# Altium PCB 电机控制.PcbDoc (part 2 of 4)
Units mil, origin at the board's own origin, x right, y up, seen from the top; angles counter-clockwise.
Board outline 4818.9 x 3440.94 mil, 2 copper layers (Top Layer, Bottom Layer); 168 components, 177 nets, 592 pads, 87 vias.
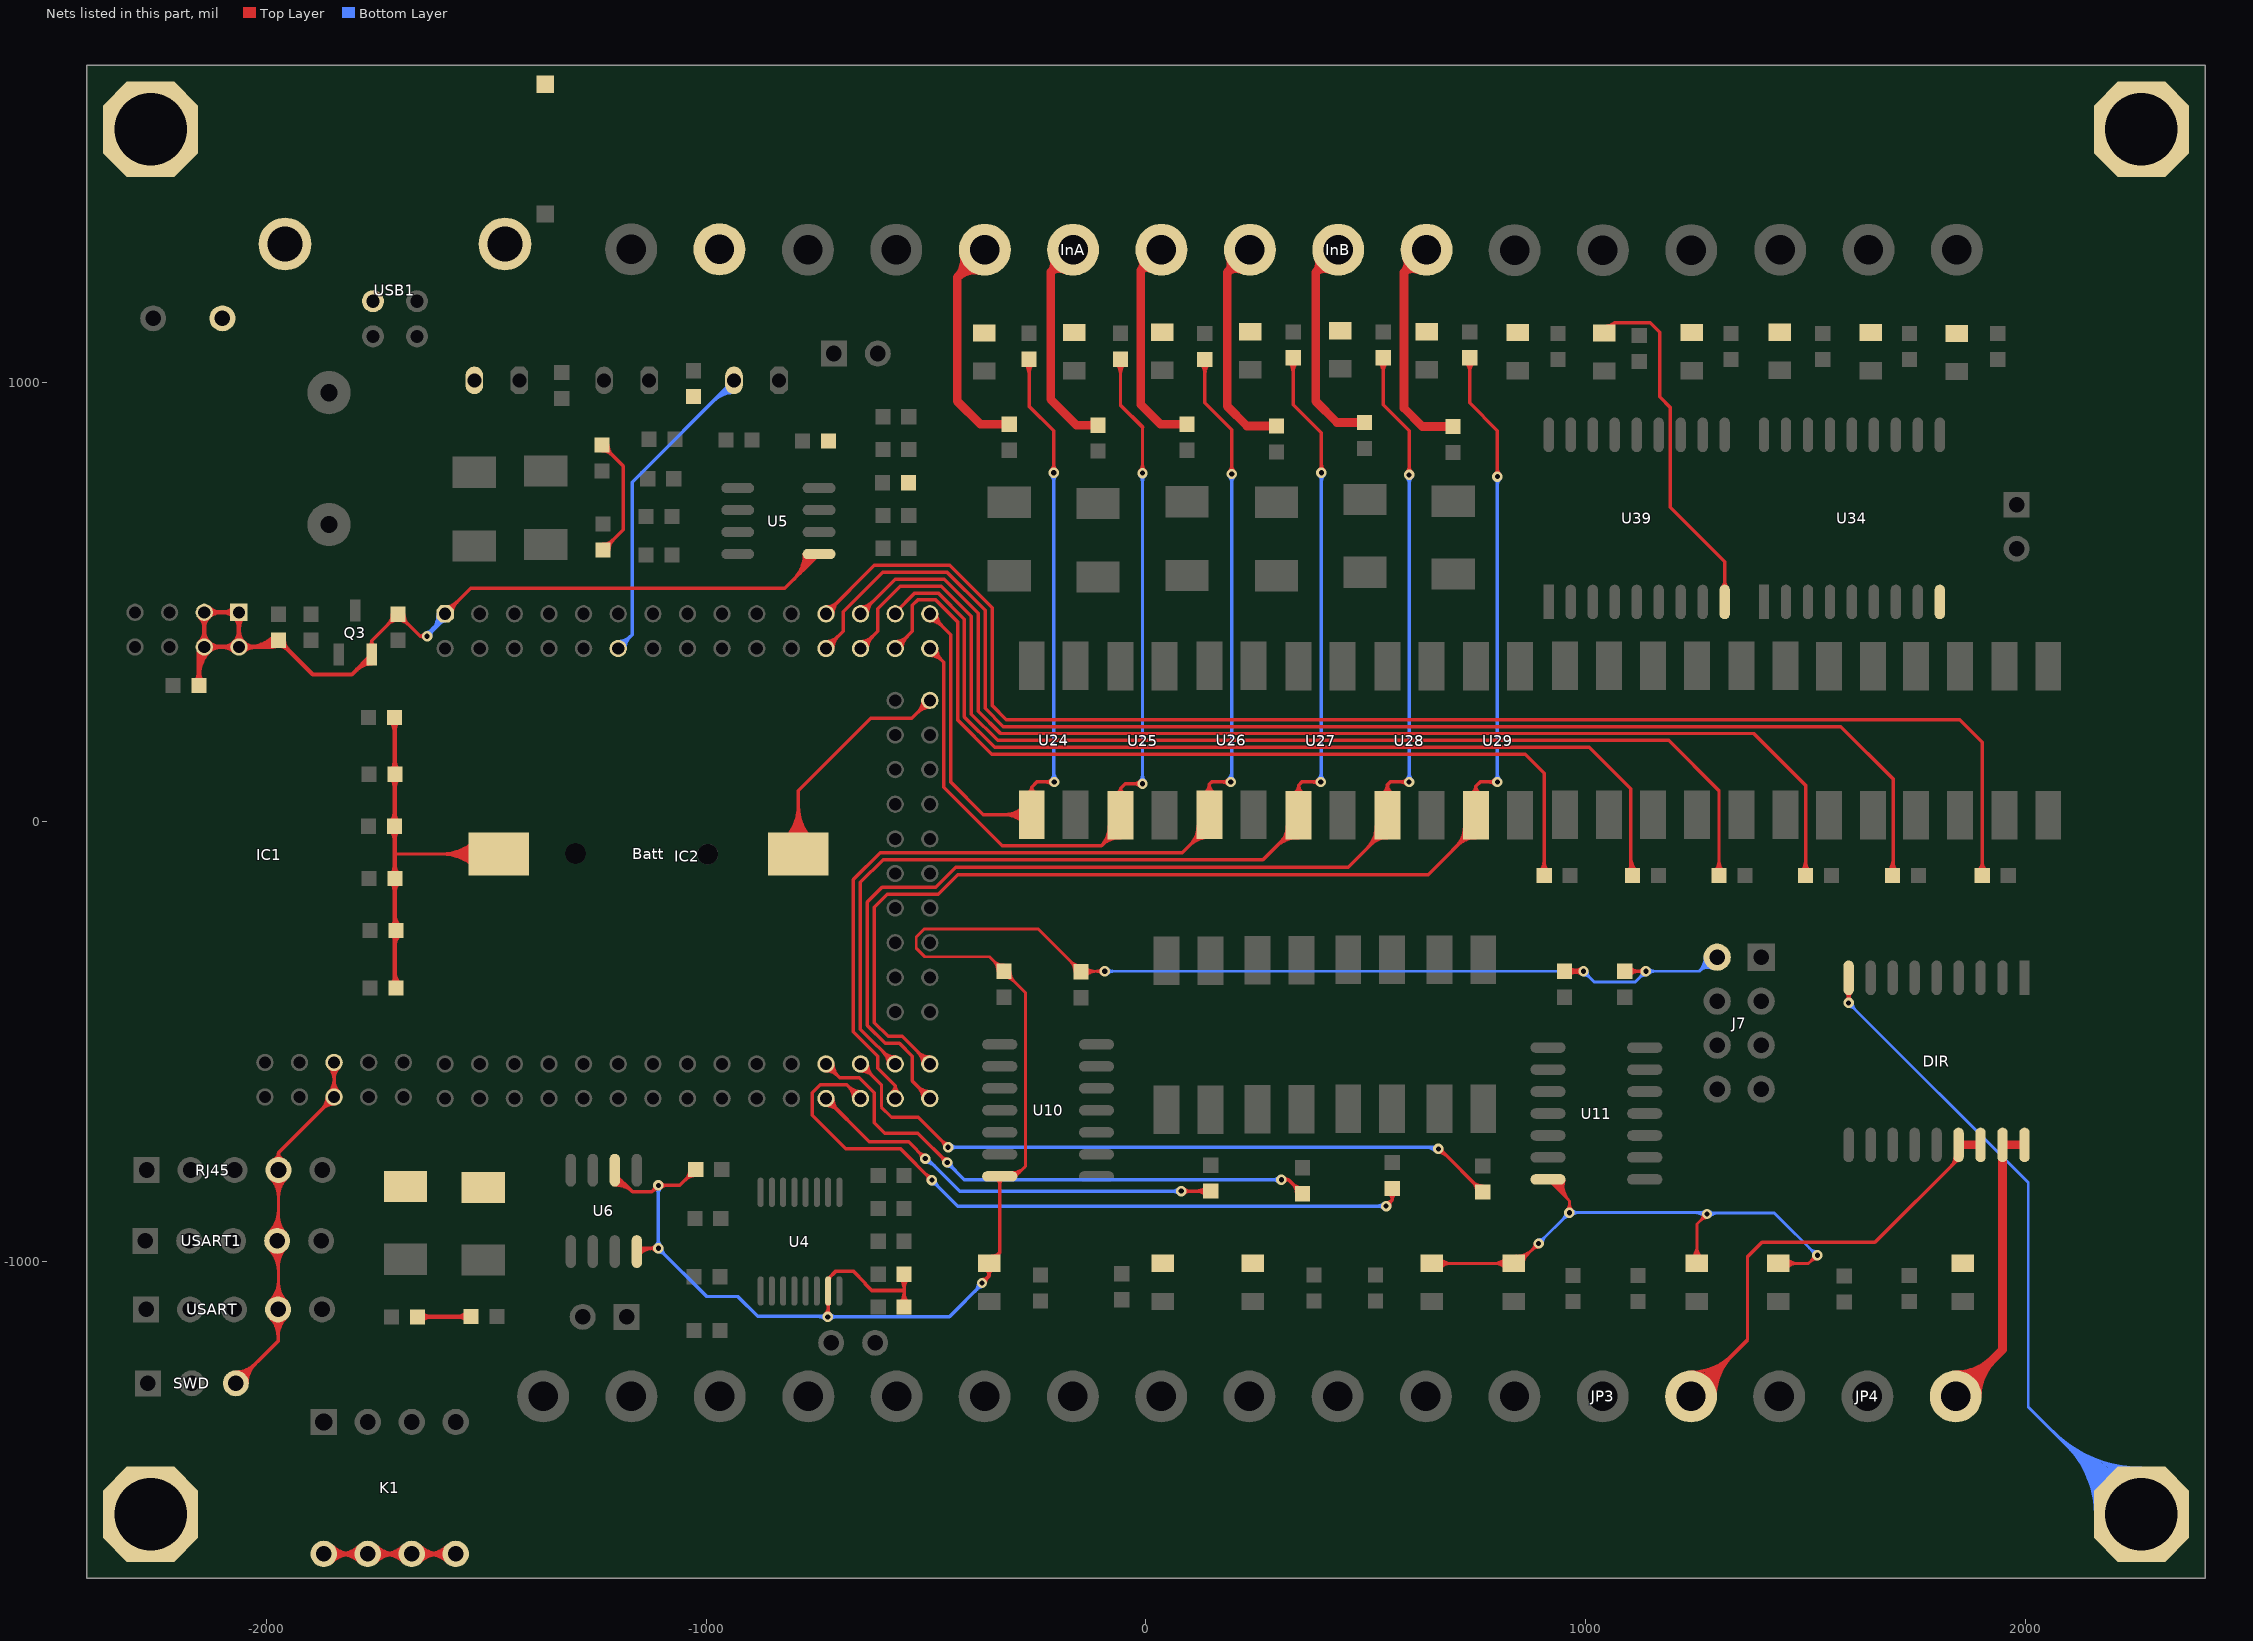
[diagram p2: the nets of this part, all layers, seen from the top]

## Via types
v1: diameter 23.62, hole 11.81, Top Layer to Bottom Layer, 87 vias

## Nets (pads, with @x,y where several pads share a name; then routed paths per layer and width w, separated by ;. In a path a pad name is that pad's centre, name@x,y a point inside that pad or via, vN(x,y) a via of type N, cw(c..) or ccw(c..) an arc to the next point about the centre after c; other vN are vias at no path point) (continued)
DIR3: DIR.15 DIR.16 JP3.3 | length 1711.4
  Top Layer w7.87: JP3.3@1239.57,-1307 1368,-1178.57 1368,-989 1401,-956 1658,-956 1848,-766 DIR.15@1848,-734.92 ; JP3.3@1239.57,-1275.5 ccw(c1239.57,-1199.46) 1293.34,-1253.23 ccw(c1347.11,-1307) JP3.3@1271.07,-1307 ; JP3.3@1239.57,-1267.63 ccw(c1239.57,-1172.58) 1306.78,-1239.79 ccw(c1373.99,-1307) JP3.3@1278.95,-1307 ; JP3.3@1239.57,-1259.75 ccw(c1239.57,-1145.7) 1320.23,-1226.35 ccw(c1400.88,-1307) JP3.3@1286.82,-1307 ; JP3.3@1239.57,-1251.88 ccw(c1239.57,-1118.81) 1333.67,-1212.91 ccw(c1427.76,-1307) JP3.3@1294.69,-1307 ; 1832.07,-781.93 ccw(c1812.62,-762.48) DIR.15@1840.13,-762.48 ; 1840.57,-773.43 cw(c1848,-780.87) DIR.15@1848,-770.35
  Top Layer w19.68: DIR.15@1848,-734.92 DIR.16@1898,-734.92
DIR4: DIR.17 DIR.18 JP4.3 | length 964.8
  Top Layer w19.68: JP4.3@1841.57,-1307 1948,-1200.57 DIR.17@1948,-734.92 DIR.18@1998,-734.92 ; JP4.3@1841.57,-1277.47 ccw(c1841.57,-1206.19) 1891.98,-1256.59 ccw(c1942.39,-1307) JP4.3@1871.1,-1307 ; JP4.3@1841.57,-1257.79 ccw(c1841.57,-1138.98) 1925.59,-1222.99 ccw(c2009.6,-1307) JP4.3@1890.79,-1307
ERR_LED: IC2.12 LED3.K | length 899.1
  Bottom Layer w7.87: IC2.12@-1200.3,394.26 -1168.8,425.76 -1168.8,772.14 LED3.K@-937.01,1003.94 ; IC2.12@-1200.3,410.01 ccw(c-1200.3,448.03) -1173.42,421.14 ccw(c-1146.53,394.26) IC2.12@-1184.55,394.26 ; -984.06,956.88 cw(c-937.01,909.83) LED3.K@-937.01,976.37 ; -970.62,970.33 cw(c-937.01,936.71) LED3.K@-937.01,984.25 ; -957.18,983.77 cw(c-937.01,963.6) LED3.K@-937.01,992.12 ; -956.3,984.65 ccw(c-964.09,992.44) LED3.K@-953.07,992.44
GND: Batt.2 C1.2 C2.2 C3.2 C4.2 C5.2 C6.2 C7.2 C8.2 C9.2 C18.2 C19.2 C20.2 C24.2 C25.1 C26.1 C27.2 C28.1 C29.1 D1.A D2.A Ddir1.K Ddir2.K Ddir3.K Ddir4.K DIR.9 IC1.2 IC1.4 IC1.5 IC2.1 J1.1 J7.1 K1.5 K1.6 K1.7 K1.8 LED1.K LED10.K LED12.K LED14.K LED16.K LED27.K LED28.K LED29.K LED30.K LED31.K LED32.K LED33.K LED34.K LED35.K LED36.K LED37.K LED260.K PAD1.1 PAD2.1 PAD3.1 PAD4.1 Q3.2 R11.2 R14.1 R37.2 R38.2 R39.2 R40.2 RJ45.4 S2.2 SWD.3 U4.15 U5.5 U6.2 U6.8 U10.7 U11.7 U34.9 U39.9 USART1.4 USART.4 USB1.4 USB1.5 USB1.6 | length 23189.6
  Top Layer w6.5: R37.2@-337.07,-339.95 ccw(c-371.05,-339.95) -347.02,-315.92 ccw(c-323,-291.9) R37.2@-323,-325.87 ; U10.7@-332.65,-806.47 -296.46,-806.47 -274,-784 -274,-388.94 R37.2@-323,-339.95 -356,-306.94 -503.3,-306.94 -522.45,-287.79 -522.45,-262.27 -504.18,-244 -244.94,-244 R38.2@-148,-340.95 -147.05,-340 v1(-94,-340) ; R37.2@-330.57,-339.95 ccw(c-348.85,-339.95) -335.93,-327.02 ccw(c-323,-314.09) R37.2@-323,-332.37 ; R37.2@-323,-354.02 cw(c-323,-387.99) -298.98,-363.97 cw(c-274.95,-339.95) R37.2@-308.93,-339.95 ; R37.2@-323,-347.52 cw(c-323,-365.8) -310.07,-352.87 cw(c-297.14,-339.95) R37.2@-315.43,-339.95 ; U10.7@-304.65,-804.22 ccw(c-304.65,-779.03) -286.84,-796.84 ; U10.7@-304.65,-797.72 ccw(c-304.65,-756.84) -275.74,-785.74 ; R38.2@-162.07,-340.95 ccw(c-196.05,-340.95) -172.02,-316.92 ccw(c-148,-292.9) R38.2@-148,-326.87 ; R38.2@-155.57,-340.95 ccw(c-173.85,-340.95) -160.93,-328.02 ccw(c-148,-315.09) R38.2@-148,-333.37 ; R38.2@-142.64,-346.3 cw(c-127.44,-361.51) -127.44,-340 ; R38.2@-138.05,-350.9 cw(c-111.74,-377.2) -111.74,-340 ; R38.2@-138.05,-330.99 ccw(c-116.31,-309.25) -116.31,-340 ; v1@-100.05,-346.05 ccw(c-114.67,-360.67) -114.67,-340 ccw(c-114.67,-319.33) v1@-100.05,-333.95 ; Ddir2.K@650,-1004.39 LED14.K@836,-1004.39 847.61,-1004.39 v1(893,-959) ; Ddir2.K@662.93,-1011.41 cw(c679.89,-1028.37) 679.89,-1004.39 cw(c679.89,-980.4) Ddir2.K@662.93,-997.36 ; Ddir2.K@667.53,-1016.01 cw(c695.58,-1044.07) 695.58,-1004.39 cw(c695.58,-964.71) Ddir2.K@667.53,-992.77 ; LED14.K@818.47,-1016.01 ccw(c790.42,-1044.07) 790.42,-1004.39 ccw(c790.42,-964.71) LED14.K@818.47,-992.77 ; LED14.K@823.07,-1011.41 ccw(c806.11,-1028.37) 806.11,-1004.39 ccw(c806.11,-980.4) LED14.K@823.07,-997.36 ; LED14.K@841.91,-994.45 ccw(c841.91,-956.7) 868.6,-983.4 ; LED14.K@841.91,-987.95 ccw(c841.91,-934.5) 879.7,-972.3 ; LED14.K@858.34,-1004.39 cw(c884.25,-1004.39) 865.93,-986.07 ; v1@884.44,-959 cw(c863.77,-959) 878.39,-973.61 cw(c893,-988.23) v1@893,-967.56 ; U11.7@913.2,-805.4 ccw(c922.49,-807.97) U11.7@915.67,-814.78 ; U11.7@914.36,-813.47 963,-862.11 ; U11.7@919.46,-807.13 ccw(c934.84,-811.39) U11.7@923.56,-822.67 ; U11.7@925.73,-808.87 ccw(c947.2,-814.81) 931.45,-830.56 ; U11.7@931.99,-810.6 ccw(c959.56,-818.22) 939.34,-838.45 ; U11.7@938.26,-812.33 ccw(c971.92,-821.64) 947.22,-846.33 ; U11.7@944.52,-814.06 ccw(c984.27,-825.06) 955.11,-854.22 ; U11.7@950.79,-815.8 ccw(c996.63,-828.48) 963,-862.11 ; R39.2@952,-339.95 952.06,-340 v1(995,-340) ; v1@956.95,-882.95 ccw(c942.33,-868.33) 963,-868.33 ccw(c983.67,-868.33) v1@969.05,-882.95 ; R39.2@957.36,-345.3 cw(c970.15,-358.09) 970.15,-340 ; R39.2@957.36,-334.59 ccw(c970.42,-321.53) 970.42,-340 ; R39.2@961.95,-349.9 cw(c985.84,-373.79) v1@985.84,-340 ; R39.2@961.95,-329.99 ccw(c986.11,-305.84) v1@986.11,-340 ; v1(963,-889) 963,-862.11 ; 972.88,-336.45 ccw(c977.99,-317.4) v1@989.85,-333.16 ; 972.92,-343.46 cw(c977.96,-362.3) v1@989.8,-346.8 ; 979.81,-338.31 cw(c976.49,-350.69) v1@987.59,-344.28 ; 979.95,-341.58 ccw(c976.69,-329.43) v1@987.59,-335.72 ; v1@988.95,-346.05 ccw(c974.33,-360.67) 974.33,-340 ccw(c974.33,-319.33) v1@988.95,-333.95 ; R40.2@1089,-339.95 1089.06,-340 v1(1137,-340) ; R40.2@1094.36,-345.3 cw(c1107.15,-358.09) 1107.15,-340 ; R40.2@1094.36,-334.59 ccw(c1107.42,-321.53) 1107.42,-340 ; R40.2@1098.95,-349.9 cw(c1122.84,-373.79) 1122.84,-340 ; R40.2@1098.95,-329.99 ccw(c1123.11,-305.84) 1123.11,-340 ; v1@1130.95,-346.05 ccw(c1116.33,-360.67) 1116.33,-340 ccw(c1116.33,-319.33) v1@1130.95,-333.95 ; Ddir3.K@1241.38,-992.77 ccw(c1213.32,-964.71) 1253,-964.71 ccw(c1292.68,-964.71) Ddir3.K@1264.62,-992.77 ; Ddir3.K@1245.98,-997.36 ccw(c1229.02,-980.4) 1253,-980.4 ccw(c1276.99,-980.4) Ddir3.K@1260.03,-997.36 ; Ddir3.K@1253,-1004.39 1253,-915 v1(1276,-892) ; v1@1267.44,-892 cw(c1246.77,-892) 1261.39,-906.61 cw(c1276,-921.23) v1@1276,-900.56 ; LED16.K@1438,-1004.39 1506.61,-1004.39 1525,-986 v1(1527,-986) ; LED16.K@1450.93,-1011.41 cw(c1467.89,-1028.37) 1467.89,-1004.39 cw(c1467.89,-980.4) LED16.K@1450.93,-997.36 ; LED16.K@1455.53,-1016.01 cw(c1483.58,-1044.07) 1483.58,-1004.39 cw(c1483.58,-964.71) LED16.K@1455.53,-992.77 ; 1508.97,-1002.03 cw(c1527,-1020.06) v1@1527,-994.56 ; 1513.8,-997.2 ccw(c1502.6,-986) v1@1518.44,-986 ; v1@1591.95,-405.95 ccw(c1577.33,-391.33) 1598,-391.33 ccw(c1618.67,-391.33) v1@1604.05,-405.95 ; DIR.9@1591.95,-388.61 cw(c1577.33,-403.23) 1598,-403.23 cw(c1618.67,-403.23) DIR.9@1604.05,-388.61 ; v1@1593.19,-404.92 ccw(c1588.94,-398.65) 1596.25,-396.69 ; v1@1593.72,-404.59 ccw(c1587.26,-393.4) 1599.74,-396.74 ; 1596.26,-396.75 ccw(c1608.74,-393.4) v1@1602.28,-404.59 ; v1(1598,-412) DIR.9@1598,-355 ; 1599.75,-396.69 ccw(c1607.07,-398.65) v1@1602.81,-404.92
  Top Layer w7.87: SWD.3@-2070,-1277 -1974,-1181 USART.4@-1974,-1109 -1973,-1108 RJ45.4@-1973,-792 -1973,-752.52 ; SWD.3@-2070,-1259.28 ccw(c-2070,-1216.51) -2039.76,-1246.76 ccw(c-2009.51,-1277) SWD.3@-2052.28,-1277 ; SWD.3@-2070,-1251.41 ccw(c-2070,-1189.63) -2026.31,-1233.31 ccw(c-1982.63,-1277) SWD.3@-2044.41,-1277 ; USART1.4@-1994.1,-971.1 cw(c-2045.02,-1022.02) -1973,-1022.02 ; USART1.4@-1994.1,-934.9 ccw(c-2045.02,-883.98) -1973,-883.98 ; USART.4@-1992.1,-1127.1 cw(c-2035.78,-1170.78) -1974,-1170.78 cw(c-1912.22,-1170.78) USART.4@-1955.9,-1127.1 ; USART.4@-1992.1,-1090.9 ccw(c-2038.2,-1044.8) -1973,-1044.8 ; RJ45.4@-1991.1,-810.1 cw(c-2034.78,-853.78) -1973,-853.78 cw(c-1911.22,-853.78) RJ45.4@-1954.9,-810.1 ; USART1.4@-1988.53,-965.53 cw(c-2026.01,-1003.01) -1973,-1003.01 ; USART1.4@-1988.53,-940.47 ccw(c-2026.01,-902.99) -1973,-902.99 ; USART.4@-1986.53,-1121.53 cw(c-2016.77,-1151.77) -1974,-1151.77 cw(c-1931.23,-1151.77) USART.4@-1961.47,-1121.53 ; USART.4@-1986.53,-1096.47 ccw(c-2019.19,-1063.81) -1973,-1063.81 ; RJ45.4@-1985.53,-804.53 cw(c-2015.77,-834.77) -1973,-834.77 cw(c-1930.23,-834.77) RJ45.4@-1960.47,-804.53 ; RJ45.4@-1983.45,-768.64 ccw(c-1990.66,-752.52) -1973,-752.52 ; USART1.4@-1982.96,-959.96 cw(c-2007,-984) -1973,-984 ; USART1.4@-1982.96,-946.04 ccw(c-2007,-922) -1973,-922 ; -1973,-1068.64 ccw(c-1933.64,-1068.64) USART.4@-1961.47,-1096.47 ; -1973,-1049.63 ccw(c-1914.63,-1049.63) USART.4@-1955.9,-1090.9 ; -1973,-1007.54 cw(c-1921.46,-1007.54) USART1.4@-1957.9,-971.1 ; -1973,-988.53 cw(c-1940.47,-988.53) USART1.4@-1963.47,-965.53 ; -1973,-917.47 ccw(c-1940.47,-917.47) USART1.4@-1963.47,-940.47 ; -1973,-898.46 ccw(c-1921.46,-898.46) USART1.4@-1957.9,-934.9 ; RJ45.4@-1962.55,-768.64 cw(c-1955.34,-752.52) -1973,-752.52 ; IC1.2@-1862.23,-626 cw(c-1900.25,-626) -1873.37,-652.88 cw(c-1846.48,-679.77) IC1.2@-1846.48,-641.75 ; IC1.2@-1857.62,-614.86 ccw(c-1884.5,-587.98) -1846.48,-587.98 ccw(c-1808.46,-587.98) IC1.2@-1835.35,-614.86 ; IC1.2@-1857.62,-558.39 cw(c-1884.5,-585.28) -1846.48,-585.28 cw(c-1808.46,-585.28) IC1.2@-1835.35,-558.39 ; IC1.2@-1846.48,-547.26 IC1.2@-1846.48,-626 -1973,-752.52 ; Q3.2@-1766.54,398.79 ccw(c-1779.66,412.06) -1761,412.06 ; Q3.2@-1761,380 -1761,412.06 ; Q3.2@-1755.46,398.79 cw(c-1742.33,412.06) -1761,412.06 ; C6.2@-1714.39,472.05 cw(c-1746.7,472.05) -1723.85,449.2 cw(c-1701,426.35) -1701,458.67 cw(c-1701,426.35) -1678.15,449.2 cw(c-1655.3,472.05) C6.2@-1687.62,472.05 ; -1708.94,-75 -1707.23,-73.28 Batt.2@-1471.72,-73.28 ; v1@-1641.25,417.21 ccw(c-1650.95,409.79) -1650.95,422 ; v1@-1641.25,426.79 cw(c-1650.95,434.21) -1650.95,422 ; v1(-1635,422) -1650.95,422 ; Batt.2@-1523.42,-105.3 ccw(c-1600.71,-182.59) -1600.71,-73.28 ccw(c-1600.71,36.02) Batt.2@-1523.42,-41.27 ; Batt.2@-1517.86,-99.73 ccw(c-1581.7,-163.58) -1581.7,-73.28 ccw(c-1581.7,17.01) Batt.2@-1517.86,-46.84 ; Batt.2@-1512.29,-94.16 ccw(c-1562.7,-144.57) -1562.7,-73.28 ccw(c-1562.7,-2) Batt.2@-1512.29,-52.4 ; Batt.2@-1506.72,-88.59 ccw(c-1543.69,-125.56) -1543.69,-73.28 ccw(c-1543.69,-21.01) Batt.2@-1506.72,-57.97 ; U6.2@-1208.54,-802.33 cw(c-1208.43,-805.43) U6.2@-1206.24,-803.24 ; U6.2@-1208.27,-810.2 cw(c-1207.58,-830.22) -1193.42,-816.05 ; U6.2@-1208,-818.07 cw(c-1206.74,-855.01) -1180.6,-828.87 ; U6.2@-1208,-792.48 -1208,-801.48 -1167.78,-841.69 ; U6.2@-1207.73,-825.94 cw(c-1205.89,-879.79) -1167.79,-841.69 ; U6.8@-1152.43,-983.09 cw(c-1120.84,-1014.68) -1120.84,-970 ; -1139.85,-970 ccw(c-1139.85,-995.67) U6.8@-1158,-977.52 -1150.48,-970 v1(-1109,-970) ; v1@-1116.87,-827 cw(c-1135.88,-827) -1122.44,-840.44 cw(c-1109,-853.88) v1@-1109,-834.87 ; v1@-1114.57,-975.57 ccw(c-1128.01,-989.01) -1128.01,-970 ccw(c-1128.01,-950.99) v1@-1114.57,-964.43 ; v1@-1103.43,-832.57 cw(c-1089.99,-846.01) -1089.99,-827 cw(c-1089.99,-807.99) v1@-1103.43,-821.43 ; C20.2@-1037.44,-791 cw(c-1069.76,-791) -1046.9,-813.85 cw(c-1024.05,-836.7) C20.2@-1024.05,-804.38 ; C20.2@-1024.05,-791 -1060.06,-827 v1(-1109,-827) -1123.69,-841.69 -1167.78,-841.69 ; v1@-729.57,-1120.43 ccw(c-745.54,-1104.46) -722.95,-1104.46 ; U4.15@-725.04,-1095.8 cw(c-730.08,-1100.85) -722.95,-1100.85 cw(c-715.82,-1100.85) U4.15@-720.86,-1095.8 ; v1@-722.95,-1126 U4.15@-722.95,-1067.14 ; -722.95,-1109.52 ccw(c-707.52,-1109.52) v1@-718.43,-1120.43 ; v1(-373,-1049) -357,-1033 ; v1@-373,-1041.13 ccw(c-373,-1022.12) -359.56,-1035.56 ccw(c-346.12,-1049) v1@-365.13,-1049 ; LED10.K@-365.42,-1017.69 cw(c-375.11,-1033) -357,-1033 ; LED10.K@-357,-1004.39 -357,-1033 ; LED10.K@-348.58,-1017.69 ccw(c-338.89,-1033) -357,-1033 ; -1761,412.06 C6.2@-1701,472.05 -1650.95,422
  Top Layer w8: IC2.1@-1594,473 -1536,531 -821.48,531 U5.5@-743.48,609 ; IC2.1@-1594,488.69 ccw(c-1594,526.55) -1567.22,499.78 ccw(c-1540.45,473) IC2.1@-1578.31,473 ; C19.2@-1237,843.73 cw(c-1237,811.57) -1214.26,834.31 cw(c-1191.51,857.05) C19.2@-1223.68,857.05 ; C19.2@-1237,857.05 -1189,809.06 -1189,663.94 C18.2@-1235,617.94 ; C18.2@-1235,631.27 ccw(c-1235,663.43) -1212.26,640.69 ccw(c-1189.51,617.94) C18.2@-1221.68,617.94 ; -800.5,551.98 ccw(c-857.52,609) U5.5@-776.88,609 ; -786.84,565.64 ccw(c-830.21,609) U5.5@-768.88,609 ; -773.19,579.29 ccw(c-802.89,609) U5.5@-760.88,609 ; -759.53,592.95 ccw(c-775.58,609) U5.5@-752.88,609 ; U5.5@-745.87,606.61 ccw(c-748.27,609) U5.5@-744.88,609 ; U4.15@-722.95,-1067.14 -722.95,-1039.62 -705.13,-1021.8 -666.02,-1021.8 -638.37,-1049.46 -638.37,-1051.23 -623.6,-1066 -550.12,-1066 ; U4.15@-720.06,-1040.57 cw(c-710.8,-1040.57) -717.35,-1034.02 ; C3.2@-559.54,-1094.38 ccw(c-582.28,-1071.63) -550.12,-1071.63 ccw(c-517.95,-1071.63) C3.2@-540.7,-1094.38 ; C24.2@-559.54,-1038.41 cw(c-582.28,-1061.16) -550.12,-1061.16 cw(c-517.95,-1061.16) C24.2@-540.7,-1038.41 ; C3.2@-550.12,-1103.8 -550.12,-1066 ; C24.2@-550.12,-1028.99 -550.12,-1065.88 ; LED10.K@-357,-1004.39 -332.65,-980.04 ; LED10.K@-351.09,-988.7 ccw(c-351.09,-965.09) -334.4,-981.79 ; U10.7@-338.3,-812.12 cw(c-351.96,-825.78) -332.65,-825.78 cw(c-313.33,-825.78) U10.7@-326.99,-812.12 ; LED10.K@-336.51,-998.63 cw(c-320.41,-992.27) -332.65,-980.04 ; U10.7@-332.65,-806.47 -332.65,-980.04 ; LED30.K@1042,1111.61 1065.64,1135.25 ; LED30.K@1047.9,1127.3 ccw(c1047.9,1150.91) 1064.6,1134.21 ; LED30.K@1062.31,1117.83 cw(c1076.8,1124.09) 1065.64,1135.25 ; U39.9@1310.48,533.08 ccw(c1297.14,546.42) 1316,546.42 ccw(c1334.86,546.42) U39.9@1321.52,533.08 ; U39.9@1316,500 1316,591.45 1192.31,715.14 1192.31,942.33 1168.28,966.36 1168.28,1113.72 1146.75,1135.25 1065.64,1135.25 ; -550.12,-1066 -550,-1066 -550.12,-1065.88 ; -550.12,-1066 -550.12,-1065.88
  Top Layer w10: C1.2@-2162.66,318.71 ccw(c-2183.69,339.75) -2153.94,339.75 ccw(c-2124.2,339.75) C1.2@-2145.23,318.71 ; C1.2@-2153.94,310 -2153.94,385.44 IC1.4@-2141.76,397.62 ; -2153.94,332.75 cw(c-2076.88,332.75) -2131.37,387.24 cw(c-2106.31,362.17) -2106.31,397.62 cw(c-2106.31,433.08) -2131.37,408.01 cw(c-2106.31,433.08) -2141.76,433.08 cw(c-2177.21,433.08) IC1.4@-2152.14,408.01 ; -2153.94,356.89 cw(c-2101.03,356.89) IC1.4@-2138.45,394.31 ; -2153.94,381.03 cw(c-2125.17,381.03) IC1.4@-2145.52,401.38 ; IC1.4@-2152.14,465.98 cw(c-2177.21,440.91) -2141.76,440.91 cw(c-2106.31,440.91) -2131.37,465.98 cw(c-2106.31,440.91) -2106.31,476.36 cw(c-2106.31,511.82) IC1.4@-2131.37,486.75 ; IC1.4@-2141.76,478.76 IC1.4@-2141.76,476.36 ; IC1.4@-2073.4,387.24 ccw(c-2098.47,362.17) -2098.47,397.62 ccw(c-2098.47,433.08) -2073.4,408.01 ccw(c-2098.47,433.08) -2063.02,433.08 ccw(c-2027.57,433.08) -2052.63,408.01 ccw(c-2027.57,433.08) -2027.57,397.62 ccw(c-2027.57,362.17) IC1.4@-2052.63,387.24 ; IC1.5@-2073.4,486.75 cw(c-2098.47,511.82) -2098.47,476.36 cw(c-2098.47,440.91) -2073.4,465.98 cw(c-2098.47,440.91) -2063.02,440.91 cw(c-2027.57,440.91) IC1.5@-2052.63,465.98 ; -2039.87,397.62 ccw(c-2039.87,479.87) R14.1@-1981.71,421.71 ; -2015.73,397.62 ccw(c-2015.73,455.73) R14.1@-1974.64,414.64 ; -1991.58,397.62 ccw(c-1991.58,431.58) R14.1@-1967.57,407.57 ; R14.1@-1973,400.68 cw(c-1973,370.93) -1951.96,391.96 cw(c-1930.93,413) R14.1@-1960.68,413 ; K1.5@-1870,-1665 K1.6@-1770,-1665 K1.7@-1670,-1665 K1.8@-1570,-1665 ; K1.5@-1859.39,-1675.61 cw(c-1833.79,-1701.21) -1833.79,-1665 cw(c-1833.79,-1628.79) K1.5@-1859.39,-1654.39 ; K1.5@-1852.32,-1682.68 cw(c-1809.64,-1725.35) -1809.64,-1665 cw(c-1809.64,-1604.64) K1.5@-1852.32,-1647.32 ; -1795.14,345.86 cw(c-1761,311.72) Q3.2@-1761,360 ; K1.6@-1787.68,-1682.68 ccw(c-1830.35,-1725.35) -1830.35,-1665 ccw(c-1830.35,-1604.64) K1.6@-1787.68,-1647.32 ; K1.6@-1780.61,-1675.61 ccw(c-1806.21,-1701.21) -1806.21,-1665 ccw(c-1806.21,-1628.79) K1.6@-1780.61,-1654.39 ; -1778.07,362.93 cw(c-1761,345.86) Q3.2@-1761,370 ; Q3.2@-1761,380 -1806,335 -1895,335 R14.1@-1973,413 -1988.37,397.62 IC1.4@-2063.02,397.62 ; K1.6@-1759.39,-1675.61 cw(c-1733.79,-1701.21) -1733.79,-1665 cw(c-1733.79,-1628.79) K1.6@-1759.39,-1654.39 ; K1.6@-1752.32,-1682.68 cw(c-1709.64,-1725.35) -1709.64,-1665 cw(c-1709.64,-1604.64) K1.6@-1752.32,-1647.32 ; C26.1@-1717.71,-18.71 cw(c-1738.88,-39.88) -1708.94,-39.88 ; C26.1@-1717.71,-1.29 ccw(c-1738.88,19.88) -1708.94,19.88 ; C8.2@-1717.66,228.29 cw(c-1738.69,207.25) -1708.95,207.25 cw(c-1679.2,207.25) C8.2@-1700.23,228.29 ; C5.2@-1716.66,-137.71 cw(c-1735.28,-156.34) -1708.94,-156.34 ; C5.2@-1716.66,-120.29 ccw(c-1735.28,-101.67) -1708.94,-101.67 ; C9.2@-1716.66,99.29 cw(c-1735.28,80.67) -1708.94,80.67 ; C9.2@-1716.66,116.71 ccw(c-1735.28,135.34) -1708.94,135.34 ; C28.1@-1714.71,-255.71 cw(c-1728.64,-269.64) -1708.94,-269.64 ; C28.1@-1714.71,-238.29 ccw(c-1728.64,-224.36) -1708.94,-224.36 ; C4.2@-1714.66,-369.29 ccw(c-1728.45,-355.49) -1708.94,-355.49 ; -1708.94,-341.01 ccw(c-1668.95,-341.01) C4.2@-1697.23,-369.29 ; -1708.95,-283.86 cw(c-1669.14,-283.86) C28.1@-1697.29,-255.71 ; -1708.95,-210.14 ccw(c-1669.14,-210.14) C28.1@-1697.29,-238.29 ; -1708.94,-161.17 cw(c-1675.78,-161.17) C5.2@-1699.23,-137.71 ; -1708.94,-96.84 ccw(c-1675.78,-96.84) C5.2@-1699.23,-120.29 ; -1708.95,-39.62 cw(c-1679.38,-39.62) C26.1@-1700.29,-18.71 ; -1708.95,19.62 ccw(c-1679.38,19.62) C26.1@-1700.29,-1.29 ; -1708.94,75.84 cw(c-1675.78,75.84) C9.2@-1699.23,99.29 ; -1708.94,140.17 ccw(c-1675.78,140.17) C9.2@-1699.23,116.71 ; C8.2@-1708.94,237 -1708.94,-75 -1708.94,-375 C4.2@-1705.94,-378 ; K1.7@-1687.68,-1682.68 ccw(c-1730.35,-1725.35) -1730.35,-1665 ccw(c-1730.35,-1604.64) K1.7@-1687.68,-1647.32 ; K1.7@-1680.61,-1675.61 ccw(c-1706.21,-1701.21) -1706.21,-1665 ccw(c-1706.21,-1628.79) K1.7@-1680.61,-1654.39 ; K1.7@-1659.39,-1675.61 cw(c-1633.79,-1701.21) -1633.79,-1665 cw(c-1633.79,-1628.79) K1.7@-1659.39,-1654.39 ; C27.2@-1656.95,-1126 C29.1@-1536,-1126 ; K1.7@-1652.32,-1682.68 cw(c-1609.64,-1725.35) -1609.64,-1665 cw(c-1609.64,-1604.64) K1.7@-1652.32,-1647.32 ; C27.2@-1648.23,-1134.71 cw(c-1627.2,-1155.75) -1627.2,-1126 cw(c-1627.2,-1096.25) C27.2@-1648.23,-1117.29 ; K1.8@-1587.68,-1682.68 ccw(c-1630.35,-1725.35) -1630.35,-1665 ccw(c-1630.35,-1604.64) K1.8@-1587.68,-1647.32 ; K1.8@-1580.61,-1675.61 ccw(c-1606.21,-1701.21) -1606.21,-1665 ccw(c-1606.21,-1628.79) K1.8@-1580.61,-1654.39 ; -1567.16,-1126 ccw(c-1567.16,-1092.84) C29.1@-1543.71,-1116.29 ; -1562.33,-1126 cw(c-1562.33,-1152.34) C29.1@-1543.71,-1133.71 ; IC1.4@-2141.76,397.62 IC1.4@-2141.76,476.36 ; IC1.4@-2141.76,397.62 IC1.4@-2063.02,397.62 ; IC1.4@-2141.76,476.36 IC1.5@-2063.02,476.36 IC1.4@-2063.02,397.62
  Bottom Layer w6.5: v1(-94,-340) v1(995,-340) 1019,-364 1113,-364 v1(1137,-340) 1258.23,-340 1290.23,-308 J7.1@1299,-308 ; v1@-87.95,-346.05 cw(c-73.33,-360.67) -73.33,-340 cw(c-73.33,-319.33) v1@-87.95,-333.95 ; v1(893,-959) v1(963,-889) 1273,-889 v1(1276,-892) 1278,-890 1429,-890 v1@1528,-989 ; v1@893,-950.44 ccw(c893,-929.77) 907.61,-944.39 ccw(c922.23,-959) v1@901.56,-959 ; v1@954.44,-889 cw(c933.77,-889) 948.39,-903.61 cw(c963,-918.23) v1@963,-897.56 ; v1@969.05,-895.05 cw(c983.67,-909.67) 983.67,-889 cw(c983.67,-868.33) v1@969.05,-882.95 ; v1@988.95,-346.05 ccw(c974.33,-360.67) 974.33,-340 ccw(c974.33,-319.33) v1@988.95,-333.95 ; v1@995,-348.56 cw(c995,-369.23) 1009.61,-354.61 cw(c1024.23,-340) v1@1003.56,-340 ; v1@1128.44,-340 cw(c1107.77,-340) 1122.39,-354.61 cw(c1137,-369.23) v1@1137,-348.56 ; v1@1143.05,-346.05 cw(c1157.67,-360.67) 1157.67,-340 cw(c1157.67,-319.33) v1@1143.05,-333.95 ; 1248.09,-889 cw(c1248.09,-919.91) v1@1269.95,-898.05 ; 1262.57,-889 ccw(c1262.57,-878.57) v1@1269.95,-885.95 ; 1263.78,-889 cw(c1263.78,-904.22) v1@1274.54,-893.46 ; 1265.2,-333.03 cw(c1282.17,-350) J7.1@1291.1,-327.72 ; 1269.21,-329.02 ccw(c1248.58,-308.4) J7.1@1277.75,-308.17 ; J7.1@1271.25,-308.22 cw(c1226.81,-308.57) 1258.24,-340 cw(c1278.19,-359.95) J7.1@1288.68,-333.76 ; 1272.17,-326.07 cw(c1286.16,-340.06) J7.1@1293.52,-321.69 ; v1@1282.05,-898.05 cw(c1301.5,-917.5) 1301.5,-890 ; v1@1282.05,-885.95 ccw(c1291.84,-876.16) 1291.84,-890 ; 1508.97,-969.97 ccw(c1527,-951.94) v1@1527,-977.44 ; 1513.8,-974.8 cw(c1502.6,-986) v1@1518.44,-986 ; v1@1598,-420.56 cw(c1598,-441.23) 1612.61,-426.61 cw(c1627.23,-412) v1@1606.56,-412 ; v1(1598,-412) 2006.63,-820.63 2006.63,-1330.63 2250.8,-1574.8 PAD3.1@2263.78,-1574.8 ; 2062.35,-1386.35 ccw(c2263.78,-1184.92) PAD3.1@2263.78,-1469.79 ; 2073.45,-1397.45 ccw(c2263.78,-1207.12) PAD3.1@2263.78,-1476.29 ; 2084.54,-1408.54 ccw(c2263.78,-1229.31) PAD3.1@2263.78,-1482.79 ; 2093.68,-1417.68 cw(c1936.55,-1574.8) PAD3.1@2158.76,-1574.8 ; 2095.64,-1419.64 ccw(c2263.78,-1251.5) PAD3.1@2263.78,-1489.29 ; 2104.77,-1428.77 cw(c1958.75,-1574.8) PAD3.1@2165.26,-1574.8 ; 2106.74,-1430.74 ccw(c2263.78,-1273.69) PAD3.1@2263.78,-1495.79 ; 2115.87,-1439.87 cw(c1980.94,-1574.8) PAD3.1@2171.76,-1574.8 ; 2117.83,-1441.83 ccw(c2263.78,-1295.89) PAD3.1@2263.78,-1502.29 ; 2126.97,-1450.97 cw(c2003.13,-1574.8) PAD3.1@2178.26,-1574.8 ; 2128.93,-1452.93 ccw(c2263.78,-1318.08) PAD3.1@2263.78,-1508.79 ; 2138.06,-1462.06 cw(c2025.32,-1574.8) PAD3.1@2184.76,-1574.8 ; 2140.02,-1464.02 ccw(c2263.78,-1340.27) PAD3.1@2263.78,-1515.29 ; 2149.16,-1473.16 cw(c2047.51,-1574.8) PAD3.1@2191.26,-1574.8 ; 2151.12,-1475.12 ccw(c2263.78,-1362.46) PAD3.1@2263.78,-1521.79 ; 2160.26,-1484.26 cw(c2069.71,-1574.8) PAD3.1@2197.76,-1574.8 ; 2162.22,-1486.22 ccw(c2263.78,-1384.65) PAD3.1@2263.78,-1528.29 ; 2171.35,-1495.35 cw(c2091.9,-1574.8) PAD3.1@2204.26,-1574.8 ; 2173.31,-1497.31 ccw(c2263.78,-1406.85) PAD3.1@2263.78,-1534.79
  Bottom Layer w7.87: v1@-1636.9,429.64 ccw(c-1643.48,456.06) -1620.15,442.03 ; v1(-1635,422) -1594,463 IC2.1@-1594,473 ; v1@-1635,429.87 ccw(c-1635,448.88) -1621.56,435.44 ccw(c-1608.12,422) v1@-1627.13,422 ; v1@-1627.95,429.05 ccw(c-1671.91,473) IC2.1@-1609.75,473 ; v1@-1627.36,423.9 cw(c-1616.89,426.51) -1626.14,432.07 ; -1614.51,442.49 ccw(c-1645.02,473) IC2.1@-1601.87,473 ; -1603.81,453.19 cw(c-1594,443.38) IC2.1@-1594,457.25 ; v1@-1114.57,-964.43 ccw(c-1128.01,-950.99) -1109,-950.99 ccw(c-1089.99,-950.99) v1@-1103.43,-964.43 ; v1@-1114.57,-832.57 cw(c-1128.01,-846.01) -1109,-846.01 cw(c-1089.99,-846.01) v1@-1103.43,-832.57 ; v1@-1109,-977.87 cw(c-1109,-996.88) -1095.56,-983.44 cw(c-1082.12,-970) v1@-1101.13,-970 ; v1(-1109,-827) v1(-1109,-970) -999.38,-1079.62 -928.38,-1079.62 -883,-1125 v1@-718,-1125 ; -745.42,-1125 cw(c-745.42,-1147.42) v1@-729.57,-1131.57 ; -740.6,-1125 ccw(c-740.6,-1109.4) v1@-729.57,-1120.43 ; v1(-724,-1126) -447,-1126 v1@-372,-1051 ; v1@-718.43,-1131.57 cw(c-704.99,-1145.01) -704.99,-1126 cw(c-704.99,-1106.99) v1@-718.43,-1120.43 ; -388.56,-1067.56 ccw(c-407.13,-1049) v1@-380.87,-1049 ; -381.32,-1060.32 cw(c-373,-1068.64) v1@-373,-1056.87
INPUT1: InA.3 R64.2 | length 650
  Top Layer w19.68: InA.3@-414.49,1289.79 cw(c-467.96,1277.27) -429.13,1238.44 ; InA.3@-377.79,1253.08 ccw(c-390.3,1199.62) -429.13,1238.44 ; InA.3@-366.57,1301 -429.13,1238.44 ; R64.2@-316.29,898.77 ccw(c-329.06,886) -329.06,904.05 ccw(c-329.06,922.11) R64.2@-316.29,909.34 ; R64.2@-311,904.05 -376.5,904.05 -429.13,956.69 -429.13,1238.44
INPUT2: InA.2 R65.2 | length 588.2
  Top Layer w19.68: InA.2@-210.79,1281.08 cw(c-236.14,1269.86) -216.53,1250.25 ; InA.2@-185.71,1256 ccw(c-196.93,1230.65) -216.53,1250.25 ; InA.2@-165.79,1301 -216.54,1250.25 ; R65.2@-114.29,896.77 ccw(c-127.06,884) -127.06,902.05 ccw(c-127.06,920.11) R65.2@-114.29,907.34 ; R65.2@-109,902.05 -157.96,902.05 -216.54,960.63 -216.54,1250.25
INPUT3: InA.1 R66.2 | length 574.2
  Top Layer w19.68: InA.1@-8.35,1277.7 cw(c-25.89,1268.28) -11.81,1254.19 ; InA.1@11.7,1257.65 ccw(c2.28,1240.11) -11.81,1254.19 ; InA.1@35,1301 -11.81,1254.19 ; R66.2@87.71,898.77 ccw(c74.94,886) 74.94,904.05 ccw(c74.94,922.11) R66.2@87.71,909.34 ; R66.2@93,904.05 32.95,904.05 -11.81,948.82 -11.81,1254.19
INPUT4: InB.3 R67.2 | length 605.5
  Top Layer w19.68: InB.3@191.2,1281.6 cw(c164.5,1270.15) 185.04,1249.62 ; InB.3@217.03,1255.77 ccw(c205.58,1229.08) 185.04,1249.62 ; InB.3@236.43,1301 185.04,1249.62 ; R67.2@291.71,894.77 ccw(c278.94,882) 278.94,900.05 ccw(c278.94,918.11) R67.2@291.71,905.34 ; R67.2@297,900.05 229.87,900.05 185.04,944.88 185.04,1249.62
INPUT5: InB.2 R68.2 | length 594.4
  Top Layer w19.68: InB.2@391.98,1281.6 cw(c365.29,1270.16) 385.83,1249.62 ; InB.2@417.82,1255.77 ccw(c406.37,1229.08) 385.83,1249.62 ; InB.2@437.21,1301 385.83,1249.61 ; R68.2@491.71,902.77 ccw(c478.94,890) 478.94,908.05 ccw(c478.94,926.11) R68.2@491.71,913.34 ; R68.2@497,908.05 434.46,908.05 385.83,956.69 385.83,1249.61
INPUT6: InB.1 R69.2 | length 607.6
  Top Layer w19.68: InB.1@592.77,1281.6 cw(c566.08,1270.16) 586.62,1249.62 ; InB.1@618.6,1255.77 ccw(c607.16,1229.08) 586.62,1249.62 ; InB.1@638,1301 586.61,1249.61 ; R69.2@692.71,893.77 ccw(c679.94,881) 679.94,899.05 ccw(c679.94,917.11) R69.2@692.71,904.34 ; R69.2@698,899.05 628.5,899.05 586.61,940.94 586.61,1249.61
IO1: IC2.58 R51.1 | length 1192.3
  Top Layer w7.87: IC2.58@-727.86,-645.11 cw(c-727.86,-683.13) -700.97,-656.24 cw(c-674.09,-629.36) IC2.58@-712.11,-629.36 ; IC2.58@-727.86,-629.36 -629.22,-728 -540,-728 v1(-502,-766) ; v1@-509.87,-766 ccw(c-528.88,-766) -515.44,-752.56 ccw(c-502,-739.12) v1@-502,-758.13 ; v1(80,-840) R51.1@147,-840 ; v1@85.57,-845.57 cw(c99.01,-859.01) 99.01,-840 cw(c99.01,-820.99) v1@85.57,-834.43 ; R51.1@137.54,-849.46 ccw(c114.68,-872.32) 114.68,-840 ccw(c114.68,-807.68) R51.1@137.54,-830.53
  Bottom Layer w7.87: v1@-502,-773.87 cw(c-502,-804.63) -480.25,-782.88 ; v1@-496,-766 v1(-502,-766) -497.13,-766 -423.13,-840 v1(80,-840) ; v1@74.43,-845.57 ccw(c60.99,-859.01) 60.99,-840 ccw(c60.99,-820.99) v1@74.43,-834.43
IO2: IC2.57 R52.1 | length 1468.7
  Top Layer w7.87: IC2.57@-727.86,-566.37 cw(c-727.86,-604.39) -700.97,-577.5 cw(c-674.09,-550.62) IC2.57@-712.11,-550.62 ; IC2.57@-727.86,-550.62 -696.36,-582.12 -651.82,-582.12 -617.62,-616.31 -617.62,-684.38 -594,-708 -519,-708 v1(-452,-775) ; v1@-459.87,-775 ccw(c-478.88,-775) -465.44,-761.56 ccw(c-452,-748.12) v1@-452,-767.13 ; v1(308,-814) 324,-814 ; v1@314.24,-818.8 cw(c324,-826.32) 324,-814 ; v1@314.24,-809.2 ccw(c324,-801.68) 324,-814 ; R52.1@342.62,-846 ccw(c310.3,-846) 333.15,-823.15 ccw(c356,-800.3) R52.1@356,-832.61 ; R52.1@356,-846 324,-814
  Bottom Layer w7.87: v1@-452,-782.87 cw(c-452,-801.88) -438.56,-788.44 cw(c-425.12,-775) v1@-444.13,-775 ; v1(-452,-775) -413,-814 v1(308,-814) ; v1@302.43,-819.57 ccw(c288.99,-833.01) 288.99,-814 ccw(c288.99,-794.99) v1@302.43,-808.43
IO3: IC2.56 R53.1 | length 1833.3
  Top Layer w7.87: IC2.56@-664.87,-629.36 ccw(c-702.88,-629.36) -676,-602.48 ccw(c-649.12,-575.59) IC2.56@-649.12,-613.61 ; IC2.56@-649.12,-629.36 -680.61,-597.86 -740.9,-597.86 -759.35,-616.31 -759.35,-667.65 -683.25,-743.75 -558.25,-743.75 v1(-487,-815) ; v1@-494.87,-815 ccw(c-513.88,-815) -500.44,-801.56 ccw(c-487,-788.12) v1@-487,-807.13 ; v1(546,-874) 560,-860 ; v1@546,-866.13 ccw(c546,-847.12) 559.44,-860.56 ccw(c572.88,-874) v1@553.87,-874 ; R53.1@552.22,-844.89 cw(c541.45,-860) 560,-860 ; R53.1@560,-834 560,-860 ; R53.1@567.78,-844.89 ccw(c578.56,-860) 560,-860
  Bottom Layer w7.87: v1@-487,-822.87 cw(c-487,-841.88) -473.56,-828.44 cw(c-460.12,-815) v1@-479.13,-815 ; v1(-487,-815) -428,-874 v1(546,-874) ; v1@540.43,-879.57 ccw(c526.99,-893.01) 526.99,-874 ccw(c526.99,-854.99) v1@540.43,-868.43
IO4: IC2.55 R54.1 | length 1828
  Top Layer w7: IC2.55@-649.12,-566.81 cw(c-649.12,-605.88) -621.49,-578.25 cw(c-593.86,-550.62) IC2.55@-632.93,-550.62 ; IC2.55@-649.12,-559.81 cw(c-649.12,-581.98) -633.44,-566.3 cw(c-617.76,-550.62) IC2.55@-639.93,-550.62 ; IC2.55@-649.12,-550.62 -602,-597.74 -602,-649 -579,-672 -519,-672
  Top Layer w7.87: -519,-672 -518,-672 v1(-450,-740) ; v1@-457.87,-740 ccw(c-476.88,-740) -463.44,-726.56 ccw(c-450,-713.12) v1@-450,-732.13 ; v1@665,-751.87 cw(c665,-778.13) 683.57,-759.56 ; v1(665,-744) 668,-744 R54.1@766,-842 ; v1@672.87,-744 ccw(c684.64,-744) 676.32,-752.32 ; R54.1@752.62,-842 ccw(c720.3,-842) 743.15,-819.15 ccw(c766,-796.3) R54.1@766,-828.61
  Bottom Layer w7.87: v1(-450,-740) 661,-740 v1(665,-744) ; v1@-444.43,-745.57 cw(c-430.99,-759.01) -430.99,-740 cw(c-430.99,-720.99) v1@-444.43,-734.43 ; 636.33,-740 cw(c636.33,-772.67) v1@659.43,-749.57
IO5: IC2.54 R25.1 U26.3 | length 2986.8
  Top Layer w7.87: IC2.54@-578.85,-616.09 ccw(c-588.72,-600.62) -570.38,-600.62 ; IC2.54@-570.38,-629.36 -570.38,-600.62 ; IC2.54@-561.9,-616.09 cw(c-552.03,-600.62) -570.38,-600.62 ; 99.57,-53.43 cw(c144.18,-98.04) U26.3@144.18,-34.95 ; 100.88,-52.12 ccw(c58.12,-9.36) U26.3@118.59,-9.36 ; 113.01,-39.99 cw(c144.18,-71.16) U26.3@144.18,-27.08 ; 114.32,-38.68 ccw(c85,-9.36) U26.3@126.46,-9.36 ; R25.1@124.39,1041.72 cw(c101.54,1018.86) 133.86,1018.86 cw(c166.17,1018.86) R25.1@143.32,1041.72 ; U26.3@131.84,64.24 ccw(c120.34,85.12) 144.18,85.12 ; R25.1@133.86,1051.18 133.86,952.76 195,891.61 v1(195,791) ; U26.3@135.64,57.34 ccw(c127.67,71.8) 144.18,71.8 ccw(c160.69,71.8) U26.3@152.73,57.34 ; U26.3@156.52,64.24 cw(c168.03,85.12) 144.18,85.12 ; v1@187.35,84.98 ccw(c173.9,71.54) 173.9,90.55 ccw(c173.9,109.56) v1@187.35,96.12 ; v1@189.43,796.57 ccw(c175.99,810.01) 195,810.01 ccw(c214.01,810.01) v1@200.57,796.57 ; v1(192.91,90.55) 149.61,90.55 144.18,85.13 ; -570.38,-600.62 -610.24,-560.76 -610.24,-533.03 -665.35,-477.91 -665.35,-131.27 -604.39,-70.31 82.69,-70.31 144.18,-8.82 U26.3@144.18,16.23 144.18,85.13
  Bottom Layer w7.87: v1@187.35,96.12 ccw(c168.87,114.6) 195,114.6 ; v1@189.43,785.43 cw(c175.99,771.99) 195,771.99 cw(c214.01,771.99) v1@200.57,785.43 ; v1(192.91,90.55) 195,92.64 v1(195,791) ; 195,104.52 ccw(c206.89,104.52) v1@198.48,96.12
IO6: IC2.53 R26.1 U27.3 | length 3103.2
  Top Layer w7.87: IC2.53@-586.12,-550.62 ccw(c-624.14,-550.62) -597.26,-523.74 ccw(c-570.38,-496.85) IC2.53@-570.38,-534.87 ; IC2.53@-570.38,-550.62 -649.61,-471.39 -649.61,-137.8 -597.87,-86.05 266,-86.05 347.18,-4.87 U27.3@347.18,15.23 347.18,83.4 ; 294.13,-57.93 cw(c347.18,-110.98) U27.3@347.18,-35.95 ; 307.38,-44.68 ccw(c273.06,-10.36) U27.3@321.59,-10.36 ; 307.57,-44.49 cw(c347.18,-84.1) U27.3@347.18,-28.08 ; U27.3@320.82,-31.24 ccw(c299.94,-10.36) U27.3@329.46,-10.36 ; U27.3@321.01,-31.04 cw(c347.18,-57.21) U27.3@347.18,-20.2 ; R26.1@325.18,1045.65 cw(c302.33,1022.8) 334.65,1022.8 cw(c366.96,1022.8) R26.1@344.11,1045.65 ; R26.1@334.65,1055.12 334.65,948.82 399,884.46 v1(399,794) ; U27.3@335.17,63.42 ccw(c324.55,83.4) 347.18,83.4 ; U27.3@359.19,63.42 cw(c369.81,83.4) 347.18,83.4 ; v1@392.07,84.98 ccw(c378.63,71.54) 378.63,90.55 ccw(c378.63,109.56) v1@392.07,96.12 ; v1@393.43,799.57 ccw(c379.99,813.01) 399,813.01 ccw(c418.01,813.01) v1@404.57,799.57 ; v1(397.64,90.55) 354.33,90.55 347.18,83.4
  Bottom Layer w7.87: v1@392.07,96.12 ccw(c375.34,112.85) 399,112.85 ; v1@393.43,788.43 cw(c379.99,774.99) 399,774.99 cw(c418.01,774.99) v1@404.57,788.43 ; v1(397.64,90.55) 399,91.91 v1(399,794) ; 399,106.27 ccw(c413.36,106.27) v1@403.21,96.12
IO7: IC2.52 R27.1 U28.3 | length 3424.6
  Top Layer w7.87: IC2.52@-507.39,-629.36 ccw(c-545.4,-629.36) -518.52,-602.48 ccw(c-491.64,-575.59) IC2.52@-491.64,-613.61 ; IC2.52@-491.64,-629.36 -531.5,-589.5 -531.5,-533.03 -560.59,-503.94 -593.14,-503.94 -633.86,-463.22 -633.86,-182.45 -600.45,-149.05 -478.59,-149.05 -432.54,-103 460,-103 549.18,-13.82 U28.3@549.18,15.23 549.18,84.61 ; 503.05,-59.95 ccw(c453.46,-10.36) U28.3@523.59,-10.36 ; 511.4,-51.6 cw(c549.18,-89.39) U28.3@549.18,-35.95 ; 516.49,-46.51 ccw(c480.35,-10.36) U28.3@531.46,-10.36 ; U28.3@524.84,-38.16 cw(c549.18,-62.5) U28.3@549.18,-28.08 ; R27.1@529.91,1045.65 cw(c507.05,1022.8) 539.37,1022.8 cw(c571.69,1022.8) R27.1@548.84,1045.65 ; U28.3@529.93,-33.07 ccw(c507.23,-10.36) U28.3@539.34,-10.36 ; U28.3@536.62,63.11 ccw(c524.51,84.61) 549.18,84.61 ; R27.1@539.37,1055.12 539.37,948.82 598.43,889.76 v1(598.43,789) ; U28.3@540.48,56.25 ccw(c532.1,71.14) 549.18,71.14 ccw(c566.26,71.14) U28.3@557.88,56.25 ; U28.3@561.74,63.11 cw(c573.86,84.61) 549.18,84.61 ; v1@592.86,84.98 ccw(c579.42,71.54) 579.42,90.55 ccw(c579.42,109.56) v1@592.86,96.12 ; v1@592.86,794.57 ccw(c579.42,808.01) 598.43,808.01 ccw(c617.43,808.01) v1@603.99,794.57 ; v1(598.43,90.55) 555.12,90.55 549.18,84.61
  Bottom Layer w7.87: v1@592.86,96.12 ccw(c579.42,109.56) 598.43,109.56 ccw(c617.43,109.56) v1@603.99,96.12 ; v1@592.86,783.43 cw(c579.42,769.99) 598.43,769.99 cw(c617.43,769.99) v1@603.99,783.43 ; v1(598.43,90.55) v1(598.43,789)
IO8: IC2.51 R28.1 U29.3 | length 3444.5
  Top Layer w7.87: IC2.51@-507.39,-550.62 ccw(c-545.4,-550.62) -518.52,-523.74 ccw(c-491.64,-496.85) IC2.51@-491.64,-534.87 ; IC2.51@-491.64,-550.62 -554.07,-488.19 -586.61,-488.19 -618.11,-456.69 -618.11,-194.11 -588.8,-164.8 -472.07,-164.8 -427.78,-120.5 641.5,-120.5 750.18,-11.82 U29.3@750.18,15.23 750.18,80.89 ; 705.47,-56.53 ccw(c659.3,-10.36) U29.3@724.59,-10.36 ; 708.98,-53.02 cw(c750.18,-94.22) U29.3@750.18,-35.95 ; 718.91,-43.09 ccw(c686.18,-10.36) U29.3@732.46,-10.36 ; U29.3@722.42,-39.58 cw(c750.18,-67.34) U29.3@750.18,-28.08 ; R28.1@726.76,1045.65 cw(c703.9,1022.8) 736.22,1022.8 cw(c768.54,1022.8) R28.1@745.69,1045.65 ; R28.1@736.22,1055.12 736.22,952.76 799.21,889.76 v1(799.21,785) ; U29.3@739.42,64.03 ccw(c731.6,80.89) 750.18,80.89 ; U29.3@760.94,64.03 cw(c768.76,80.89) 750.18,80.89 ; v1@793.64,84.98 ccw(c780.2,71.54) 780.2,90.55 ccw(c780.2,109.56) v1@793.64,96.12 ; v1@793.64,790.57 ccw(c780.2,804.01) 799.21,804.01 ccw(c818.22,804.01) v1@804.78,790.57 ; v1(799.21,90.55) 759.84,90.55 750.18,80.89
  Bottom Layer w7.87: v1@793.64,96.12 ccw(c780.2,109.56) 799.21,109.56 ccw(c818.22,109.56) v1@804.78,96.12 ; v1@793.64,779.43 cw(c780.2,765.99) 799.21,765.99 cw(c818.22,765.99) v1@804.78,779.43 ; v1(799.21,90.55) v1(799.21,785)
IO9: IC2.30 R24.1 U25.3 | length 2329
  Top Layer w7.87: IC2.30@-491.64,378.51 cw(c-491.64,340.49) -464.75,367.38 cw(c-437.87,394.26) IC2.30@-475.89,394.26 ; IC2.30@-491.64,394.26 -460.14,362.76 -460.14,78.25 -327.33,-54.56 -101.8,-54.56 U25.3@-57.82,-10.57 ; -101.66,-54.41 ccw(c-145.71,-10.36) U25.3@-83.41,-10.36 ; -101.14,-53.9 cw(c-57.82,-97.22) U25.3@-57.82,-35.95 ; -88.21,-40.97 ccw(c-118.82,-10.36) U25.3@-75.54,-10.36 ; -87.7,-40.45 cw(c-57.82,-70.33) U25.3@-57.82,-28.08 ; R24.1@-67.47,1042.54 cw(c-90.32,1019.68) -58,1019.68 cw(c-25.68,1019.68) R24.1@-48.54,1042.54 ; U25.3@-65.72,65.16 ccw(c-69.26,76.04) -57.82,76.04 ; R24.1@-58,1052 -58,947.76 -8,897.76 ; U25.3@-57.82,15.23 -57.82,76.04 ; U25.3@-49.91,65.16 cw(c-46.38,76.04) -57.82,76.04 ; v1@-13.57,798.57 ccw(c-27.01,812.01) -8,812.01 ccw(c11.01,812.01) v1@-2.43,798.57 ; v1@-13.44,81.05 ccw(c-26.88,67.6) -26.88,86.61 ccw(c-26.88,105.62) v1@-13.44,92.18 ; v1(-8,793) -8,897.76 ; v1(-7.87,86.61) -47.24,86.61 -57.82,76.04 ; -7.87,897.64 -8,897.76
  Bottom Layer w7.87: v1@-13.57,787.43 cw(c-27.01,773.99) -8,773.99 cw(c11.01,773.99) v1@-2.43,787.43 ; v1@-13.44,92.18 ccw(c-26.58,105.32) -8,105.32 ; -8,105.93 ccw(c11.44,105.93) v1@-2.31,92.18 ; v1(-8,793) -8,86.74 v1(-7.87,86.61)
IO10: IC2.29 R23.1 U24.3 | length 2149
  Top Layer w7.87: IC2.29@-491.64,457.25 cw(c-491.64,419.23) -464.75,446.12 cw(c-437.87,473) IC2.29@-475.89,473 ; IC2.29@-491.64,473 -444.39,425.76 -444.39,90.39 -370.23,16.23 U24.3@-259.82,16.23 -259.82,78.76 ; U24.3@-277.91,-1.87 ccw(c-321.6,-45.55) -321.6,16.23 ccw(c-321.6,78.01) U24.3@-277.91,34.32 ; R23.1@-275.47,1042.54 cw(c-298.32,1019.68) -266,1019.68 cw(c-233.68,1019.68) R23.1@-256.54,1042.54 ; U24.3@-272.35,3.7 ccw(c-302.59,-26.54) -302.59,16.23 ccw(c-302.59,59) U24.3@-272.35,28.76 ; U24.3@-268.81,65.78 ccw(c-273.69,78.76) -259.82,78.76 ; R23.1@-266,1052 -266,945 -210,889 v1(-210,794) ; U24.3@-250.82,65.78 cw(c-245.95,78.76) -259.82,78.76 ; v1@-215.57,799.57 ccw(c-229.01,813.01) -210,813.01 ccw(c-190.99,813.01) v1@-204.43,799.57 ; v1@-214.23,84.98 ccw(c-227.67,71.54) -227.67,90.55 ccw(c-227.67,109.56) v1@-214.23,96.12 ; v1(-208.66,90.55) -248.03,90.55 -259.82,78.76
  Bottom Layer w7.87: v1@-215.57,788.43 cw(c-229.01,774.99) -210,774.99 cw(c-190.99,774.99) v1@-204.43,788.43 ; v1@-214.23,96.12 ccw(c-224.44,106.33) -210,106.33 ; -210,112.79 ccw(c-186.42,112.79) v1@-203.09,96.12 ; v1(-210,794) -210,91.89 v1(-208.66,90.55)
IO11: IC2.28 R75.1 | length 2192.7
  Top Layer w7.87: IC2.28@-570.38,394.26 -531.5,433.14 -531.5,492.13 -519.12,504.5 -478.59,504.5 -428.64,454.55 -428.64,231.79 -350.39,153.54 862.2,153.54 905.51,110.24 R75.1@905.51,-122.05 ; IC2.28@-570.38,410.01 ccw(c-570.38,448.03) -543.49,421.14 ccw(c-516.61,394.26) IC2.28@-554.63,394.26 ; R75.1@896.05,-112.58 ccw(c873.2,-89.73) 905.51,-89.73 ccw(c937.83,-89.73) R75.1@914.98,-112.58
IO12: IC2.27 R74.1 | length 2273.5
  Top Layer w7.87: IC2.27@-570.38,473 -570.38,475.52 -525.65,520.25 -472.07,520.25 -412.9,461.07 -412.9,238.32 -343.87,169.29 1007.87,169.29 1102.36,74.8 R74.1@1102.36,-118.11 ; R74.1@1096.83,-112.58 ccw(c1083.49,-99.24) 1102.36,-99.24 ccw(c1129.11,-99.24) R74.1@1110.2,-118.15 ; 1102.36,-80.23 ccw(c1148.12,-80.23) R74.1@1115.76,-112.58
IO13: IC2.26 R70.1 | length 2667.5
  Top Layer w7.87: IC2.26@-649.12,394.26 -610.24,433.14 -610.24,484.25 -558.5,535.99 -465.54,535.99 -397.15,467.6 -397.15,244.84 -337.35,185.04 1188.98,185.04 1303.15,70.87 R70.1@1303.15,-122.05 ; IC2.26@-649.12,410.01 ccw(c-649.12,448.03) -622.23,421.14 ccw(c-595.35,394.26) IC2.26@-633.37,394.26 ; R70.1@1293.68,-112.58 ccw(c1270.83,-89.73) 1303.15,-89.73 ccw(c1335.47,-89.73) R70.1@1312.61,-112.58
IO14: IC2.25 R71.1 | length 2820.9
  Top Layer w7.87: IC2.25@-649.12,473 -570.38,551.74 -459.02,551.74 -381.4,474.12 -381.4,251.36 -330.82,200.79 1382.21,200.79 1500,83 R71.1@1500,-121 ; IC2.25@-649.12,488.75 ccw(c-649.12,526.77) -622.23,499.88 ccw(c-595.35,473) IC2.25@-633.37,473 ; R71.1@1490.53,-112.58 ccw(c1467.68,-89.73) 1500,-89.73 ccw(c1532.32,-89.73) R71.1@1509.47,-112.58
IO15: IC2.24 R72.1 | length 3179.9
  Top Layer w7.87: IC2.24@-727.86,394.26 -688.98,433.14 -688.98,477.68 -599.17,567.49 -452.5,567.49 -365.65,480.64 -365.65,257.89 -324.3,216.54 1580,216.54 1699,97.54 R72.1@1699,-122.05 ; IC2.24@-727.86,410.01 ccw(c-727.86,448.03) -700.97,421.14 ccw(c-674.09,394.26) IC2.24@-712.11,394.26 ; R72.1@1688.53,-112.58 ccw(c1663.27,-87.32) 1699,-87.32 ; 1699,-92.15 ccw(c1727.9,-92.15) R72.1@1707.47,-112.58
IO16: IC2.23 R73.1 | length 3385.9
  Top Layer w7.87: IC2.23@-727.86,473 -617.62,583.24 -445.98,583.24 -349.9,487.17 -349.9,264.41 -317.78,232.28 1850.39,232.28 1902,180.68 R73.1@1902,-122 ; IC2.23@-727.86,488.75 ccw(c-727.86,526.77) -700.97,499.88 ccw(c-674.09,473) IC2.23@-712.11,473 ; R73.1@1892.53,-112.54 ccw(c1869.68,-89.68) 1902,-89.68 ccw(c1934.32,-89.69) R73.1@1911.46,-112.54
NetBATT_1: Batt.1 IC2.32 | length 1095.2
  Top Layer w7.87: Batt.1@-822.64,-41.27 ccw(c-899.93,36.02) -790.62,36.02 ccw(c-681.32,36.02) Batt.1@-758.61,-41.27 ; Batt.1@-817.07,-46.84 ccw(c-880.92,17.01) -790.62,17.01 ccw(c-700.33,17.01) Batt.1@-764.18,-46.84 ; Batt.1@-811.5,-52.4 ccw(c-861.91,-2) -790.62,-2 ccw(c-719.34,-2) Batt.1@-769.74,-52.4 ; Batt.1@-805.93,-57.97 ccw(c-842.9,-21.01) -790.62,-21.01 ccw(c-738.35,-21.01) Batt.1@-775.31,-57.97 ; Batt.1@-790.62,-73.28 -790.62,70.38 -626,235 -532.79,235 IC2.32@-491.64,276.15 ; IC2.32@-507.39,276.15 cw(c-545.4,276.15) -518.52,249.27 cw(c-491.64,222.38) IC2.32@-491.64,260.4